# Altium PCB PCB2.PcbDoc (part 1 of 7)
Units mm, origin at the board's own origin, x right, y up, seen from the top; angles counter-clockwise.
Board outline 49 x 45 mm, 6 copper layers (Component Side, GND1, 3.3V, 1.2V, GND2, Solder Side), stack 1.629 mm thick; 56 components, 116 nets, 925 pads, 478 vias.
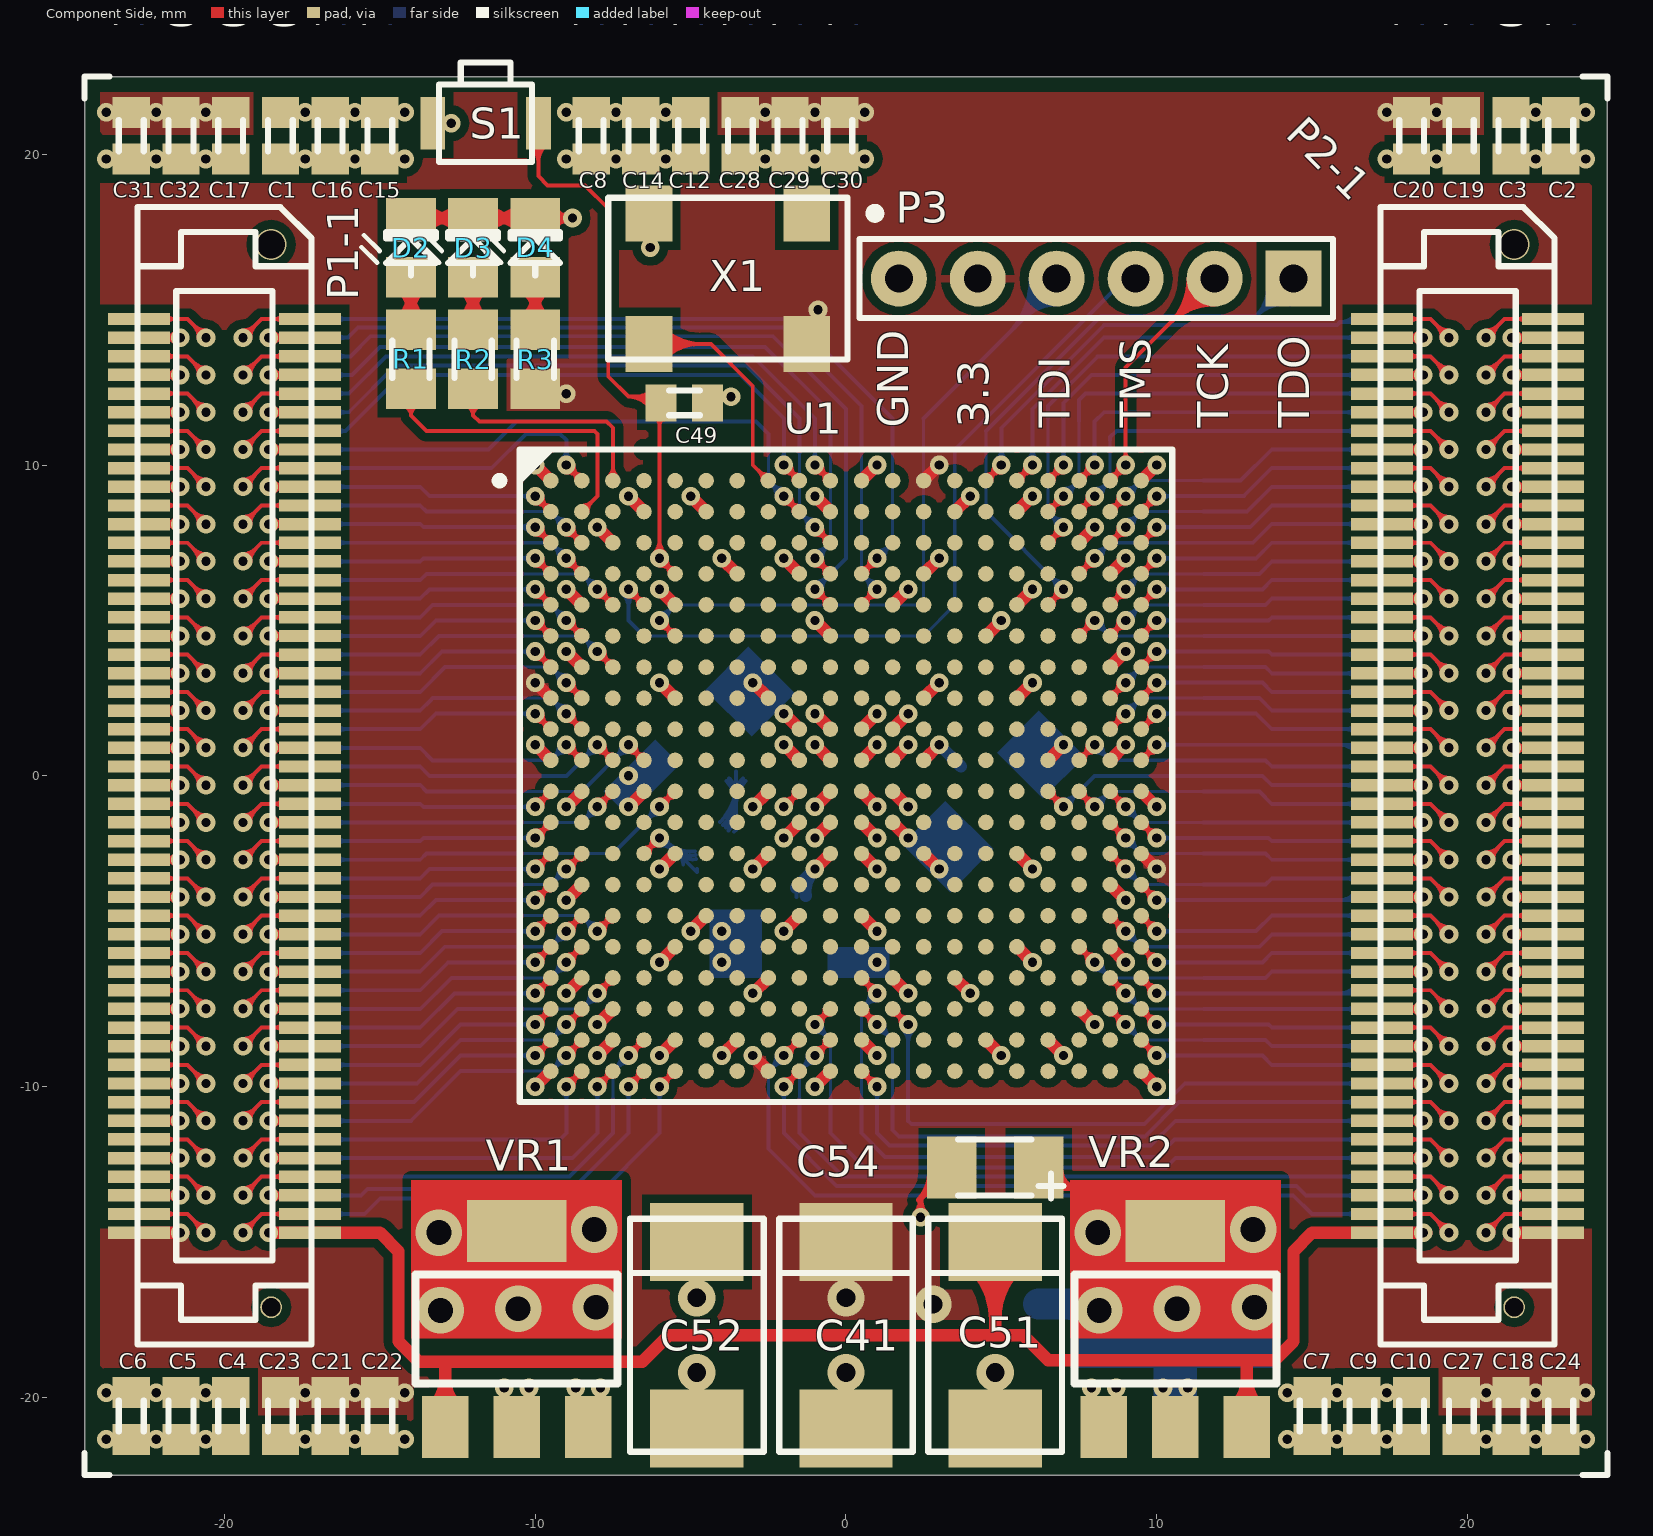
[diagram p0: Component Side view]
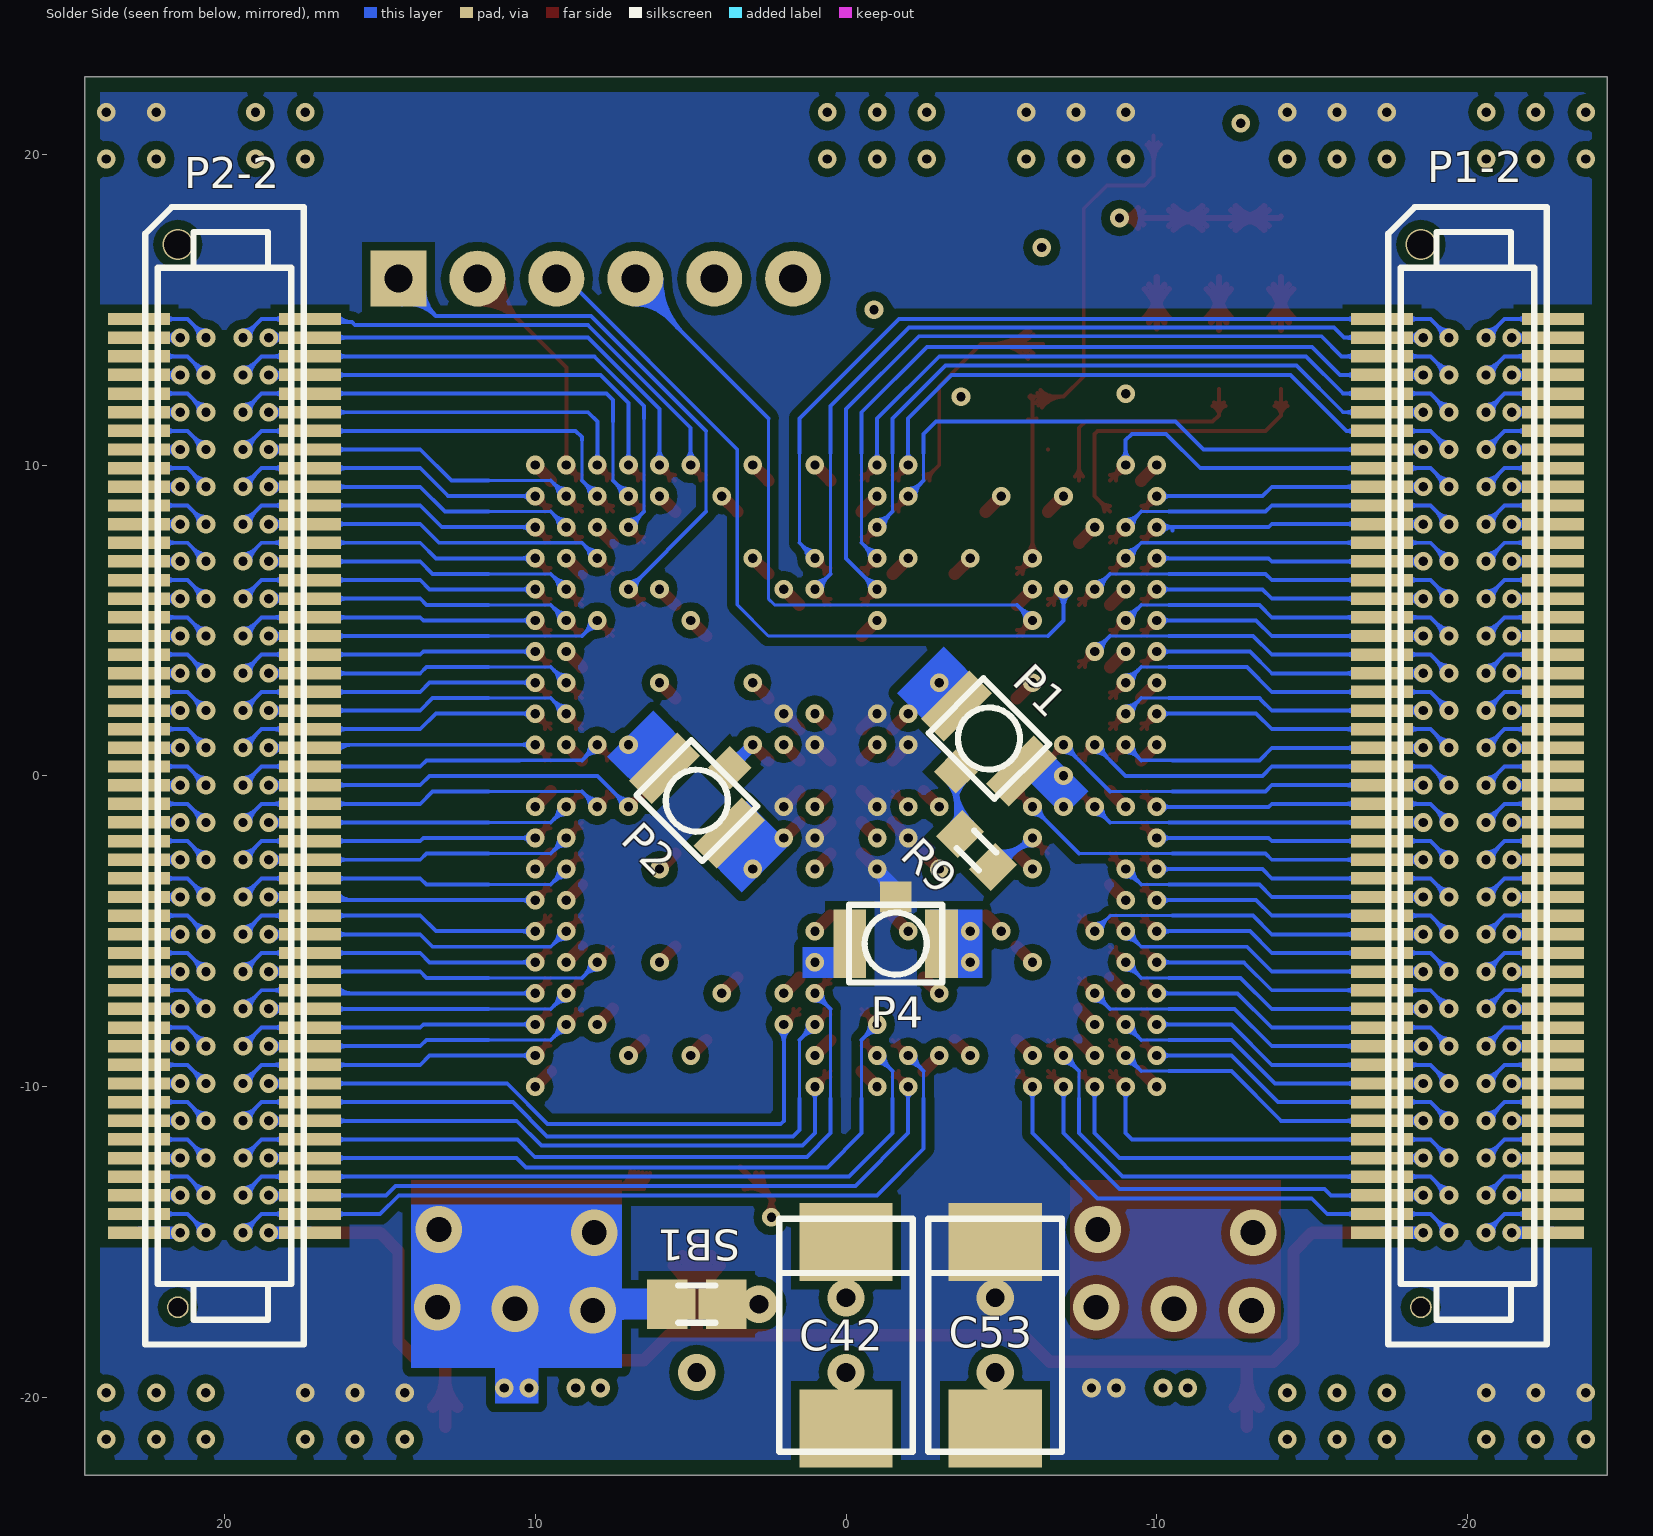
[diagram p1: Solder Side view, seen from below]
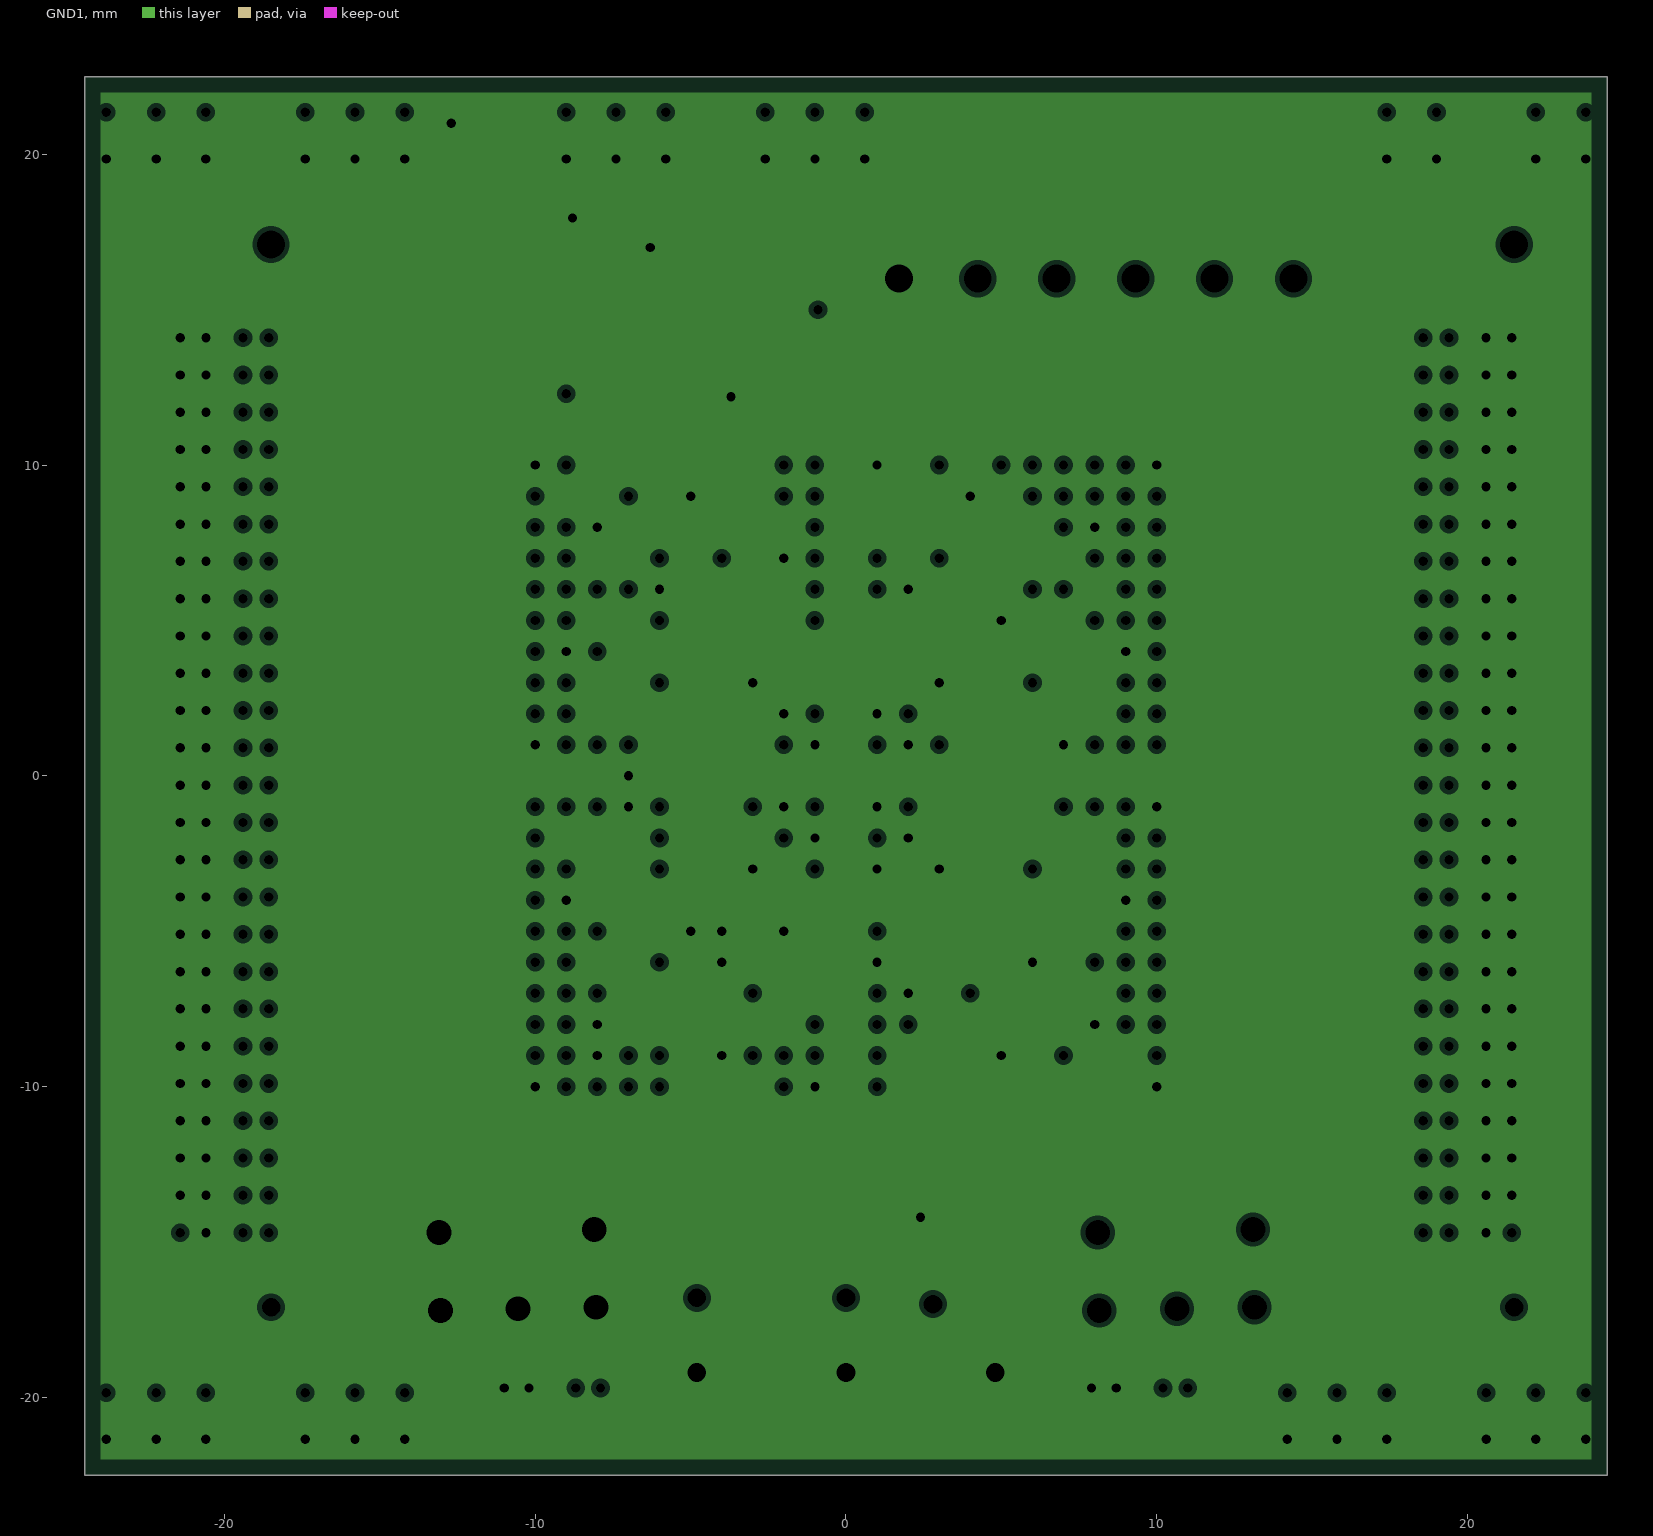
[diagram p2: GND1, clearances drawn from the general rule]
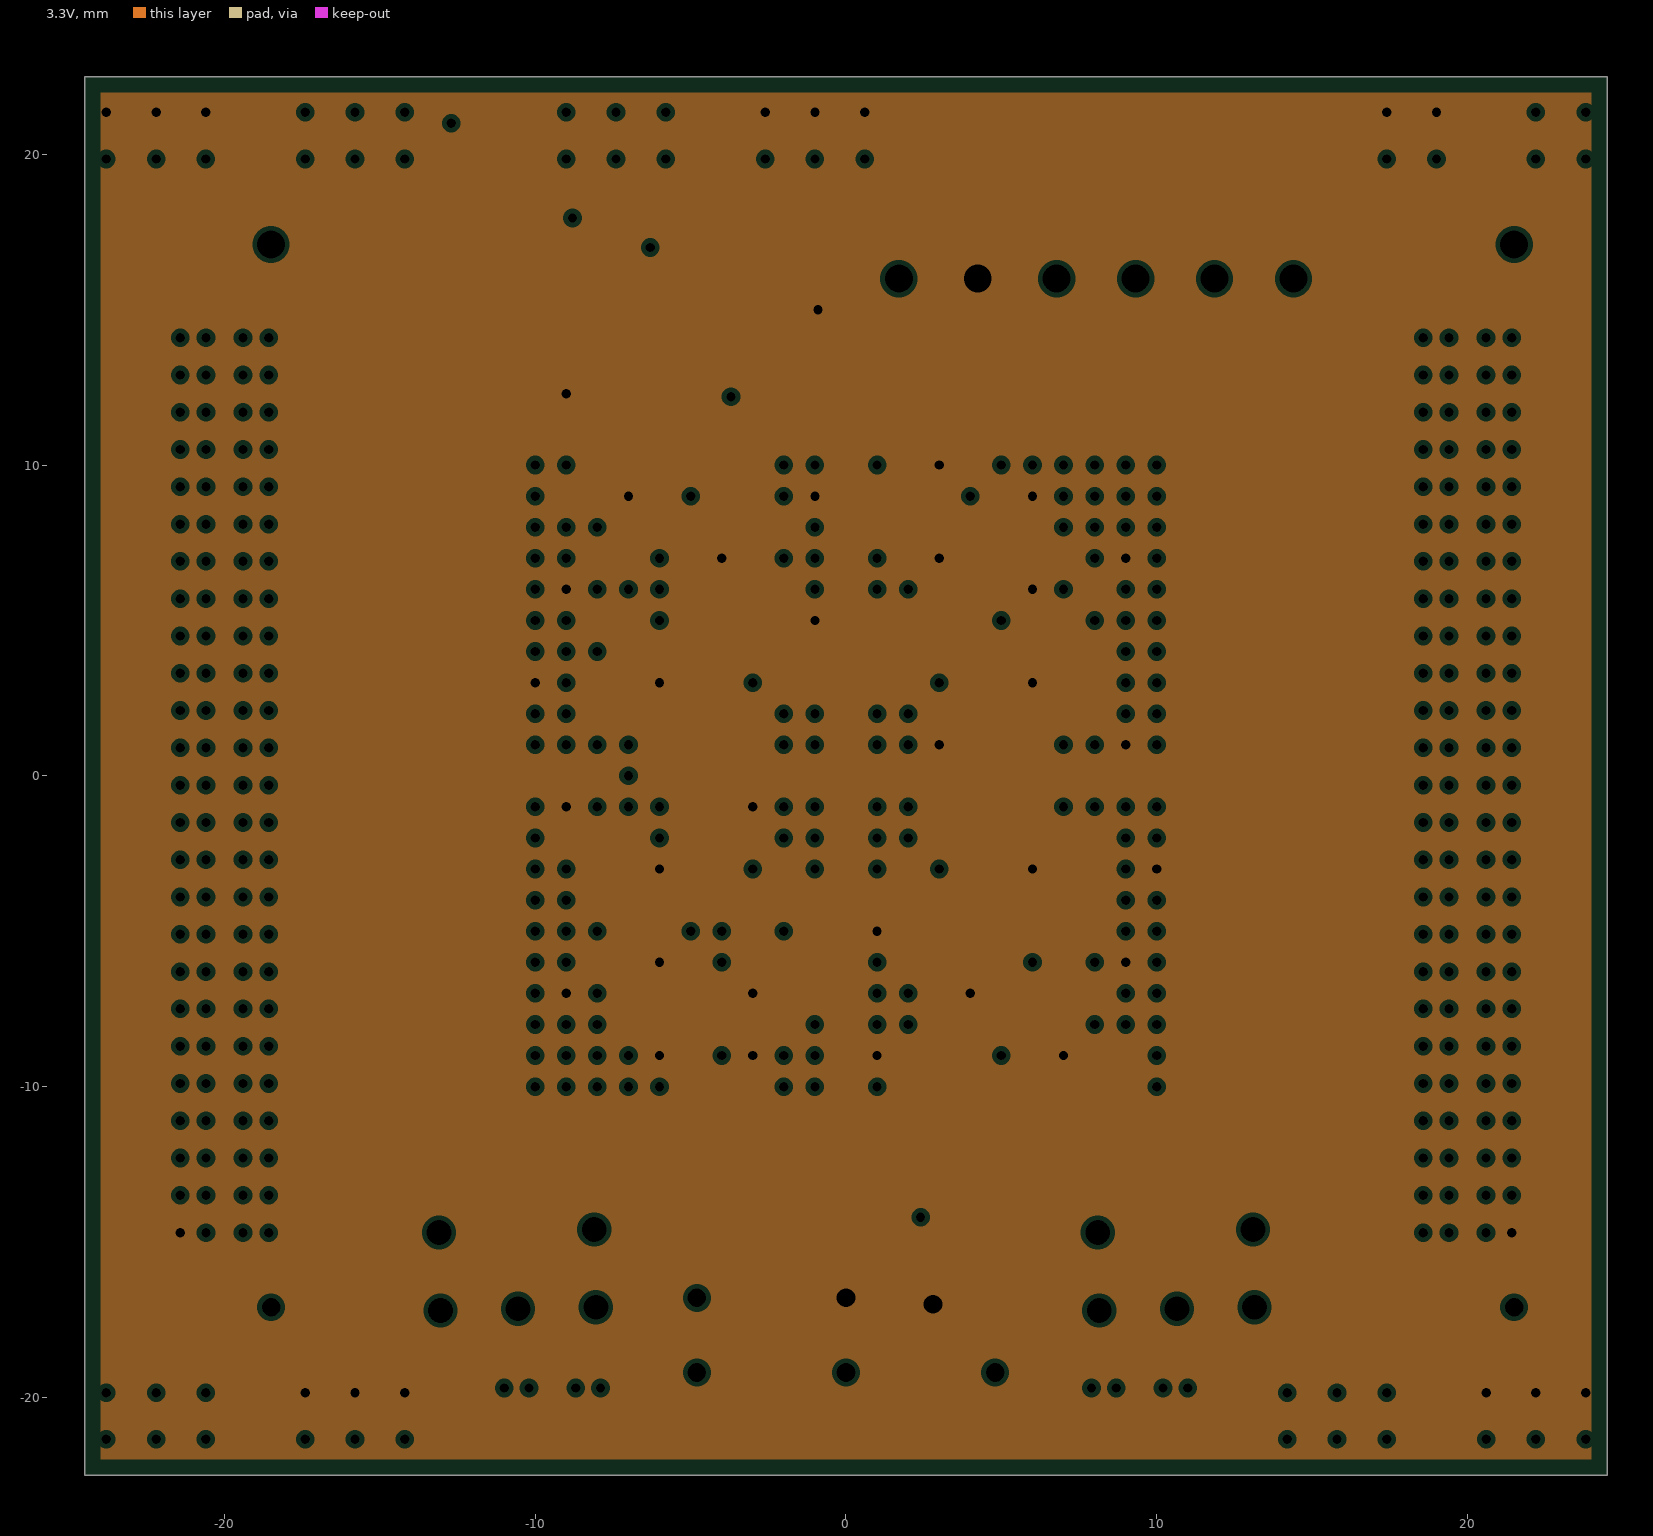
[diagram p3: 3.3V, clearances drawn from the general rule]
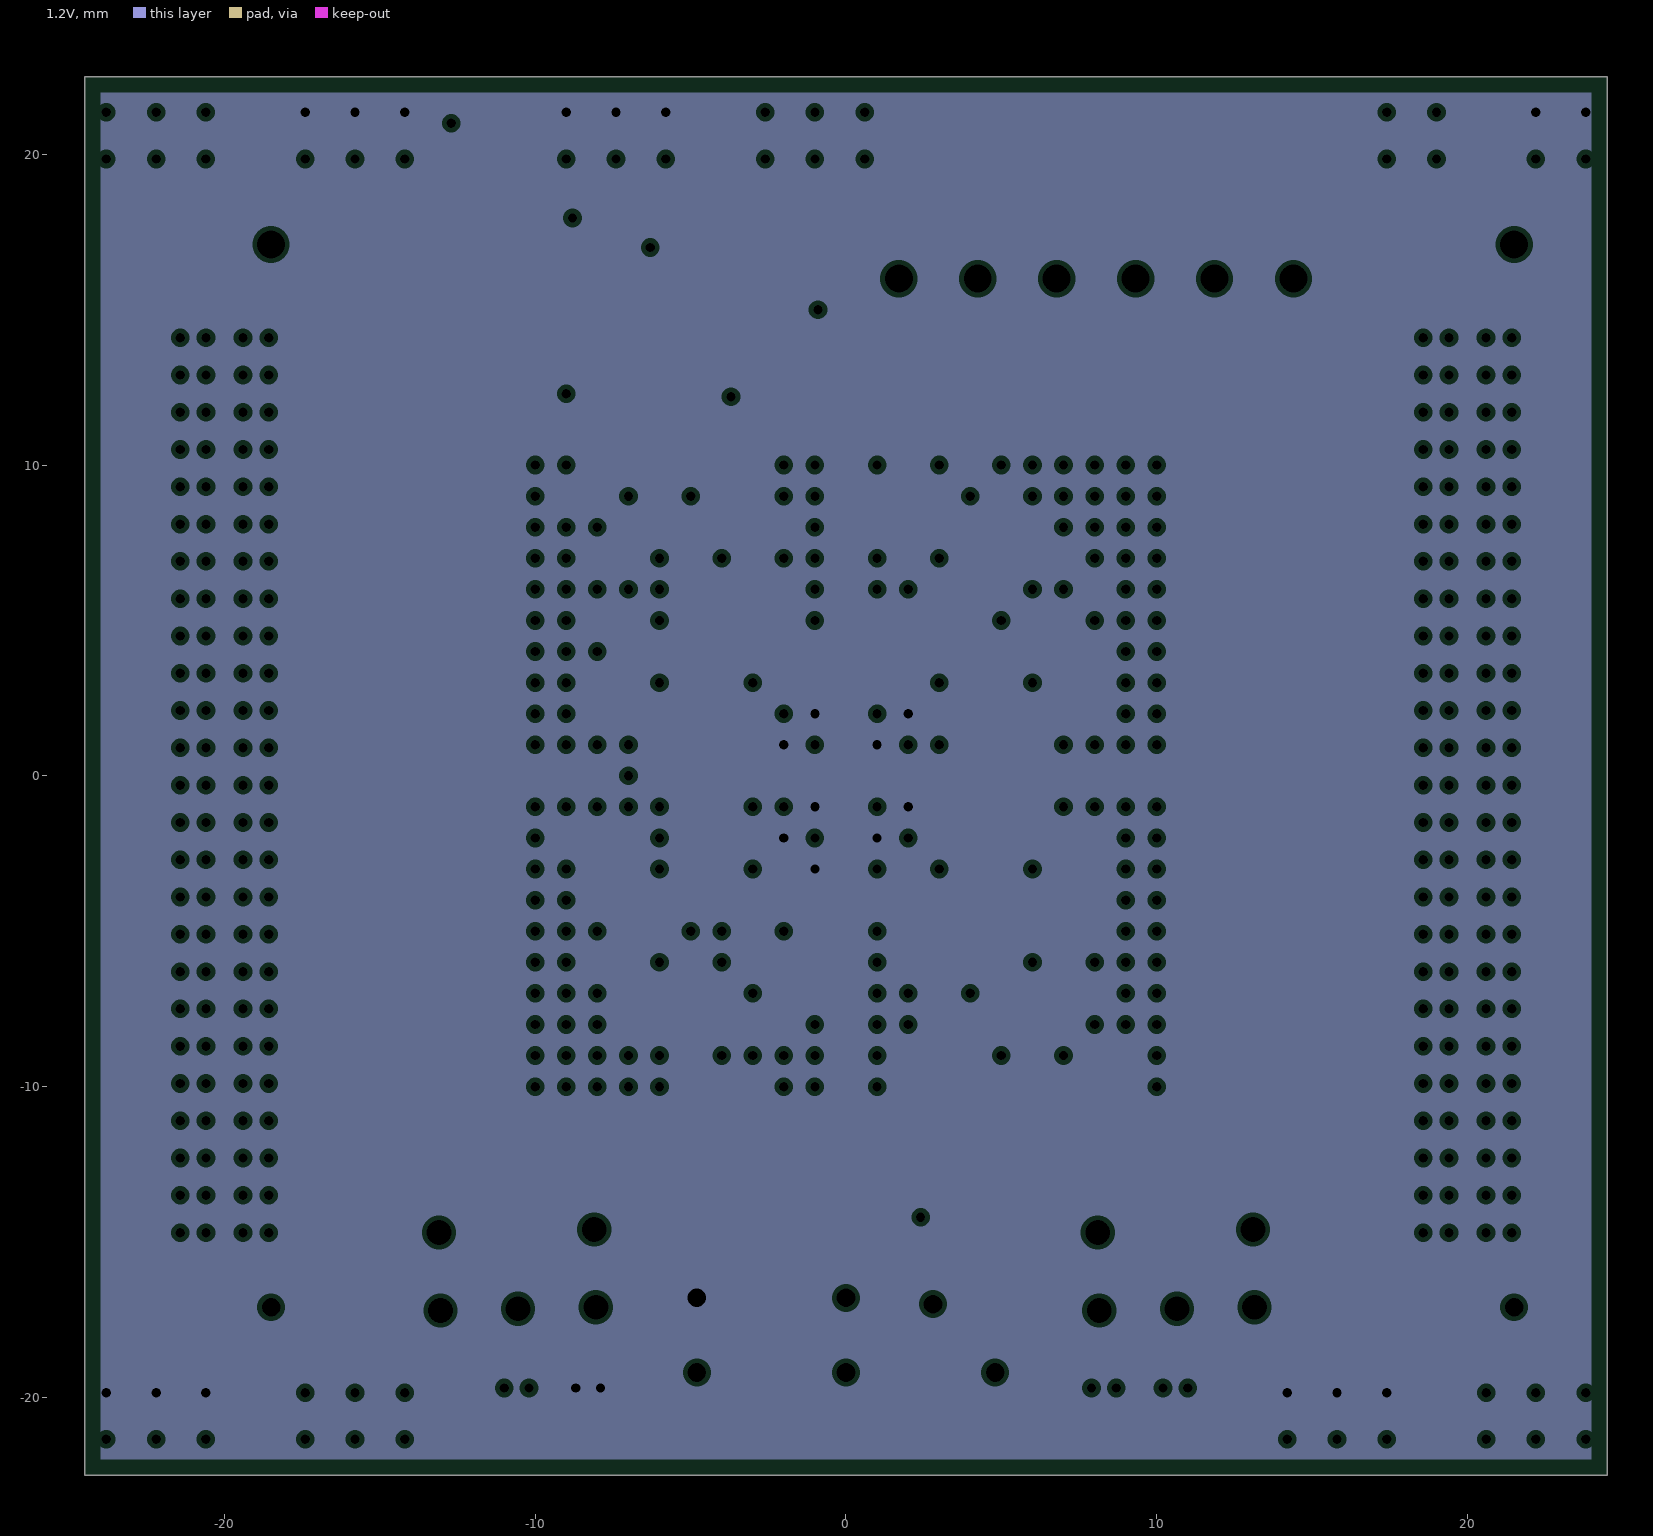
[diagram p4: 1.2V, clearances drawn from the general rule]
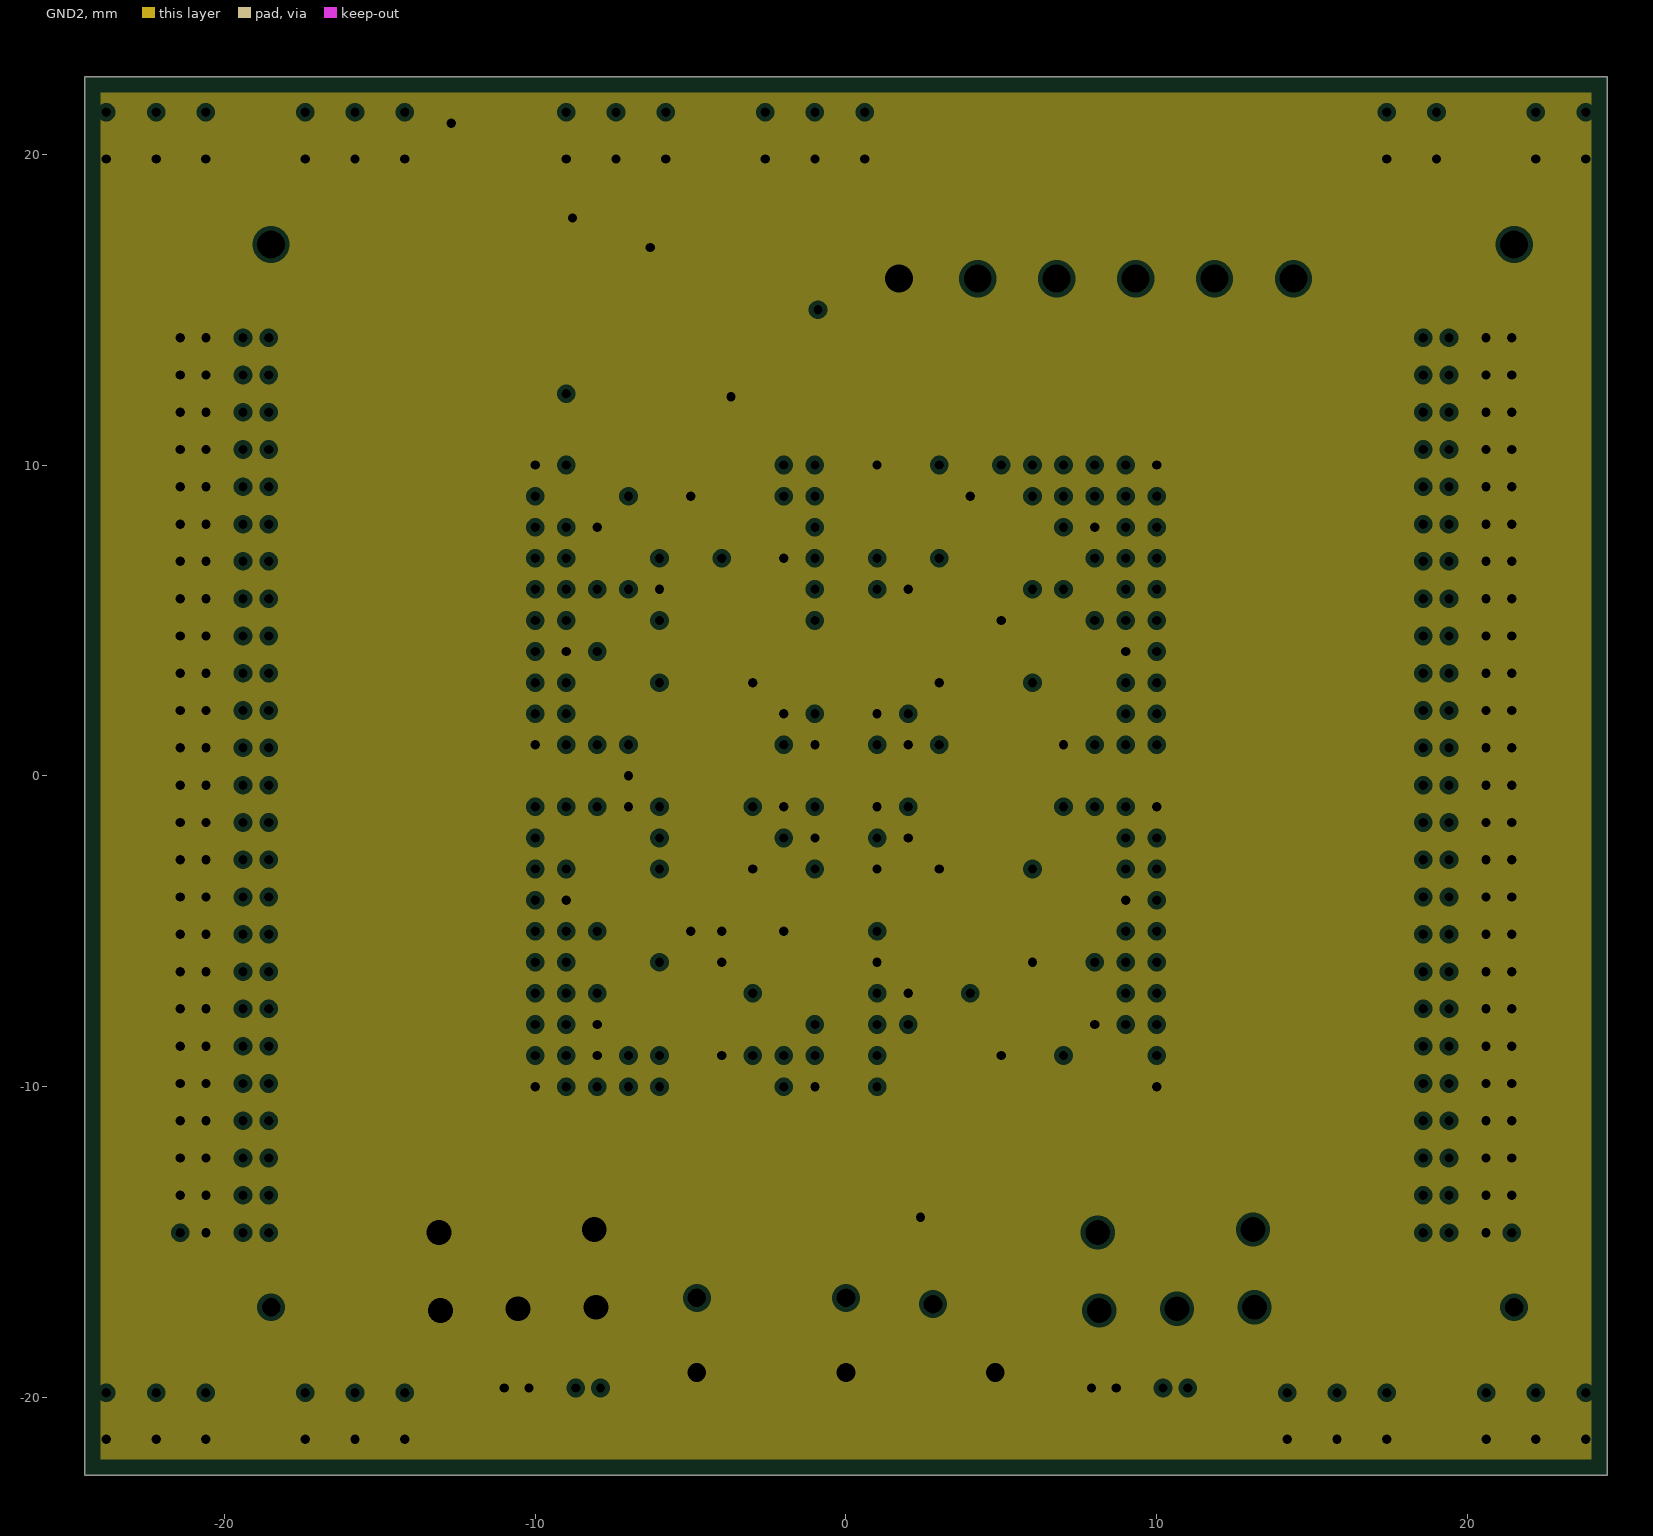
[diagram p5: GND2, clearances drawn from the general rule]

## Layer stack, top to bottom
Component Side: signal copper 0.0175
Dielectric: prepreg 0.126, FR-4, Dk 4
GND1: plane copper 0.0356, net GND
Dielectric: core 0.15, FR-4, Dk 4
3.3V: plane copper 0.0356, net 3.3V
Dielectric: prepreg 0.9, FR-4, Dk 4
1.2V: plane copper 0.0356, net 1.2V
Dielectric: core 0.15, FR-4, Dk 4
GND2: plane copper 0.0356, net GND
Dielectric: prepreg 0.126, FR-4, Dk 4
Solder Side: signal copper 0.0175

## Board outline
-24.5,-22.5 -24.5,22.5 24.5,22.5 24.5,-22.5

## Design rules (kind name [scope] priority, off if disabled: settings)
Clearance Clearance_polygons [(IsRegion)] p1: gap=0.28
Clearance [All] p2: gap=0.15
FanoutControl Fanout_Small [(CompPinCount < 5)] p4: bgadir=Out bgaviamode=Centered fanoutstyle=Auto fanoutdirection=Alternating viagrid=0.025 // Fanout_Small (Default Rule)
FanoutControl Fanout_Default [All] p5: bgadir=Out bgaviamode=Centered fanoutstyle=Auto fanoutdirection=InOnly viagrid=0.025 // Fanout_Default (Default Rule)
OvershootFalling [All] p1: maximum=300,0
OvershootRising [All] p1: maximum=300,0
PlaneClearance [All] p1: clearance=0.15
PlaneConnect PlaneConnect_Comp [All  And  Not  (InComponent('P3'))] p1: planeconnectstyle=Direct reliefexpansion=0.508 reliefentries=4 reliefconductorwidth=0.254 reliefairgap=0.254
PlaneConnect PlaneConnect_Vias [(InComponent('P3'))] p2: planeconnectstyle=Relief reliefexpansion=0.508 reliefentries=2 reliefconductorwidth=0.254 reliefairgap=0.254
PolygonConnect PolygonConnect_1 [(InComponent('P3'))] p1: connectstyle=Relief reliefconductorwidth=0.254 reliefentries=2 polygonreliefangle="90 Angle"
PolygonConnect [All  And  Not  (InComponent('P3'))] p2: connectstyle=Direct reliefconductorwidth=0.254 reliefentries=4 polygonreliefangle="90 Angle"
RoomDefinition Bank0&1 [InComponentClass('Bank0&1')] p1: confinementstyle=ConfineOut formatcopy=TRUE lockcomponents=FALSE outline 65.5,-57 89.4,-57 89.4,-3 65.5,-3
RoomDefinition Connectors [InComponentClass('Connectors')] p2: confinementstyle=ConfineOut formatcopy=TRUE lockcomponents=FALSE outline 30.9,-65 58.1,-65 58.1,-59.5 30.9,-59.5
RoomDefinition Power [InComponentClass('Power')] p3: confinementstyle=ConfineOut formatcopy=TRUE lockcomponents=FALSE outline 60.8,-68.7 66.4,-68.7 66.4,-59.5 60.8,-59.5
RoutingVias [All] p1: holewidth=0.3 width=0.6 viastyle="Through Hole" minholewidth=0.3 minwidth=0.6 maxholewidth=0.8 maxwidth=1.5
SignalStimulus [All] p1: kind=1 level=0 starttime=10,00 stoptime=60,00 periodtime=100,0
SilkscreenOverComponentPads [All] p1: minsilkscreentomaskgap=0.254
SolderMaskExpansion [All] p1: expansion=0.102
TestPointUsage [All] p1: valid=0 allowmultiple=FALSE
Testpoint [All] p1: side=15 testpointundercomponent=TRUE minsize=1.016 maxsize=2.54 preferedsize=1.524 minholesize=0 maxholesize=1.016 preferedholesize=0.813 testpointgrid=0.025 style=1023 order=0-112345678
UndershootFalling [All] p1: maximum=300,0
UndershootRising [All] p1: maximum=300,0
Width [All] p1: maxlimit=0.8 minlimit=0.1 preferedwidth=0.127
19 further rules are at their usual default settings.

## Classes and differential pairs
component class Connectors: D2 D3 D4 P1-1 P1-2 P1-02 P2-1 P2-01 P2-2 R1 R2 R3
component class Power: C1 C2 C3 C4 C5 C6 C7 C8 C9 C10 C12 C14 C15 C16 C17 C18 C19 C20 C21 C22 C23 C24 C27 C28 C29 C30 C31 C32 C41 C42 C49 C51 C52 C53 C54 P1 P2 P3 P4 R9 S1 SB1 VR1 VR2 X1
component class Bank0&1: U1

## Components (designator, comment, footprint, x,y, rotation, side; value= is the part's Value field where it differs from the comment)
C1 "Cap" 0603 -18.2,20.6 r90 top
C2 "Cap" 0603 23,20.6 r90 top
C3 "Cap" 0603 21.4,20.6 r90 top
C4 "Cap" 0603 -19.8,-20.6 r90 top
C5 "Cap" 0603 -21.4,-20.6 r90 top
C6 "Cap" 0603 -23,-20.6 r90 top
C7 "Cap" 0603 15,-20.6 r90 top
C8 "Cap" 0603 -8.2,20.6 r90 top
C9 "Cap" 0603 16.6,-20.6 r90 top
C10 "Cap" 0603 18.2,-20.6 r90 top
C12 "Cap" 0603 -5,20.6 r90 top
C14 "Cap" 0603 -6.6,20.6 r90 top
C15 "Cap" 0603 -15,20.6 r90 top
C16 "Cap" 0603 -16.6,20.6 r90 top
C17 "Cap" 0603 -19.8,20.6 r90 top
C18 "Cap" 0603 21.4,-20.6 r90 top
C19 "Cap" 0603 19.8,20.6 r90 top
C20 "Cap" 0603 18.2,20.6 r90 top
C21 "Cap" 0603 -16.6,-20.6 r90 top
C22 "Cap" 0603 -15,-20.6 r90 top
C23 "Cap" 0603 -18.2,-20.6 r90 top
C24 "Cap" 0603 23,-20.6 r90 top
C27 "Cap" 0603 19.8,-20.6 r90 top
C28 "Cap" 0603 -3.4,20.6 r90 top
C29 "Cap" 0603 -1.8,20.6 r90 top
C30 "Cap" 0603 -0.2,20.6 r90 top
C31 "Cap" 0603 -23,20.6 r90 top
C32 "Cap" 0603 -21.4,20.6 r90 top
C41 "Cap Pol1" "TANTAL SIZE X" 0,-18 r270 top
C42 "Cap Pol1" "TANTAL SIZE X" 0,-18 r270 bottom
C49 "Cap" 0603 -5.2,12 r180 top
C51 "Cap Pol1" "TANTAL SIZE X" 4.8,-18 r270 top
C52 "Cap Pol1" "TANTAL SIZE X" -4.8,-18 r270 top
C53 "Cap Pol1" "TANTAL SIZE X" -4.8,-18 r270 bottom
C54 "Cap Pol1" 1206Pol 4.8,-12.6 r180 top
D2 "LED1" LED0805 -14,17 r90 top
D3 "LED2" LED0805 -12,17 r90 top
D4 "POWER" LED0805 -10,17 r90 top
P1 "BNC" "Miniature Coaxial Connectors" -4.6,1.2 r45 bottom
P1-1 "Header 50X2" FX8C-100S-SV(91) -20,0 r270 top locked
P1-2 "Header 50X2" FX8C-100P-SV6(91) -20,0 r270 bottom locked
P2 "BNC" "Miniature Coaxial Connectors" 4.8,-0.8 r225 bottom
P2-1 "Header 50X2" FX8C-100S-SV(91) 20,0 r270 top locked
P2-2 "Header 50X2" FX8C-100P-SV6(91) 20,0 r270 bottom locked
P3 "Header 6" HDR1X6 14.4,16 r180 top
P4 "BNC" "Miniature Coaxial Connectors" -1.6,-5.4 r180 bottom
R1 "Res2" 0805 -14,13.4 r270 top
R2 "Res2" 0805 -12,13.4 r270 top
R3 "Res2" 0805 -10,13.4 r270 top
R9 "Res2" 0603 -4.2,-2.4 r45 bottom
S1 "RESET" B3U-3000P -11.6,21 r0 top
SB1 "Solder Blob" "0805 V.SOLDER_BLOB" 4.8,-17 r180 bottom
U1 "XC3S400AN-4FGG400C" FGG400 0,0 r0 top locked
VR1 "NCP566" SOT-223 -10.6,-17.8 r0 top
VR2 "LM1117" SOT-223 10.6,-17.8 r0 top
X1 "CTX283LVCT el. CFPS-39" CB3LV-3C-50M0000 -3.8,16 r180 top

## Footprints (in the part's own frame and the unit in brackets; to place one, negate y for a bottom-side part, rotate by r counter-clockwise, add the part's x,y. Pads: shape width x height; smd on the part's side, far side on the other; paste and mask are expansions set on the pad)
0603 [mm]
  rect 1x1.2 smd mask+0.05: 1(-0.75,0) 2(0.75,0)
  silkscreen extent -0.5,-0.4 0.5,0.4, body extent -0.75,-0.4 0.75,0.4, height 0.4
0805 [mm] "Resistor - MELF-R2012-0805"
  rect 1.3x1.6 smd mask+0.05: 1(-0.95,0) 2(0.95,0)
  silkscreen extent -0.6,-0.6 0.6,0.6, body extent -1,-0.6 1,0.6, height 0.5
"0805 V.SOLDER_BLOB" [mm] "Resistor - MELF-R2012-0805"
  rect 1.3x1.6 smd mask+0.05: 1(-0.95,0) 2(0.95,0)
  rect 0.5x1 smd mask+0.05: ""(-0.3,0) ""(0.3,0)
  silkscreen extent -0.6,-0.6 0.6,0.6
1206Pol [mm]
  rect 1.6x2 smd: 1(-1.4,0) 2(1.4,0)
  silkscreen extent -2.2,-0.9 1.2,1, body extent -1.7,-0.9 1.7,0.9, height 1.85
B3U-3000P [mm] "Micro kant switch Farnell varenummer: 1333655"
  rect 0.8x1.7 smd: 1(-1.7,0) 2(1.7,0)
  silkscreen extent -1.5,-1.25 1.5,1.95, body extent -2,-1.25 2,1.95, height 1.2
CB3LV-3C-50M0000 [mm] "Digi-Key Part Number CTX283LVCT-ND"
  rect 1.5x1.8 smd: 1(-2.54,-2.1) 2(2.54,-2.1) 3(2.54,2.1) 4(-2.54,2.1)
  silkscreen extent -4.86,-2.6 3.85,2.6, body extent -3.5,-2.5 3.5,2.5, height 1.4
FGG400 [mm] "BGA, 400-Leads, Body 21x21mm, Pitch 1mm"
  round 0.5 smd: A1(-9.5,9.5) A2(-8.5,9.5) A3(-7.5,9.5) A4(-6.5,9.5) A5(-5.5,9.5) A6(-4.5,9.5) A7(-3.5,9.5) A8(-2.5,9.5) A9(-1.5,9.5) A10(-0.5,9.5) A11(0.5,9.5) A12(1.5,9.5) A13(2.5,9.5) A14(3.5,9.5) A15(4.5,9.5) A16(5.5,9.5) A17(6.5,9.5) A18(7.5,9.5) A19(8.5,9.5) A20(9.5,9.5) B1(-9.5,8.5) B2(-8.5,8.5) B3(-7.5,8.5) B4(-6.5,8.5) B5(-5.5,8.5) B6(-4.5,8.5) B7(-3.5,8.5) B8(-2.5,8.5) B9(-1.5,8.5) B10(-0.5,8.5) B11(0.5,8.5) B12(1.5,8.5) B13(2.5,8.5) B14(3.5,8.5) B15(4.5,8.5) B16(5.5,8.5) B17(6.5,8.5) B18(7.5,8.5) B19(8.5,8.5) B20(9.5,8.5) C1(-9.5,7.5) C2(-8.5,7.5) C3(-7.5,7.5) C4(-6.5,7.5) C5(-5.5,7.5) C6(-4.5,7.5) C7(-3.5,7.5) C8(-2.5,7.5) C9(-1.5,7.5) C10(-0.5,7.5) C11(0.5,7.5) C12(1.5,7.5) C13(2.5,7.5) C14(3.5,7.5) C15(4.5,7.5) C16(5.5,7.5) C17(6.5,7.5) C18(7.5,7.5) C19(8.5,7.5) C20(9.5,7.5) D1(-9.5,6.5) D2(-8.5,6.5) D3(-7.5,6.5) D4(-6.5,6.5) D5(-5.5,6.5) D6(-4.5,6.5) D7(-3.5,6.5) D8(-2.5,6.5) D9(-1.5,6.5) D10(-0.5,6.5) D11(0.5,6.5) D12(1.5,6.5) D13(2.5,6.5) D14(3.5,6.5) D15(4.5,6.5) D16(5.5,6.5) D17(6.5,6.5) D18(7.5,6.5) D19(8.5,6.5) D20(9.5,6.5) E1(-9.5,5.5) E2(-8.5,5.5) E3(-7.5,5.5) E4(-6.5,5.5) E5(-5.5,5.5) E6(-4.5,5.5) E7(-3.5,5.5) E8(-2.5,5.5) E9(-1.5,5.5) E10(-0.5,5.5) E11(0.5,5.5) E12(1.5,5.5) E13(2.5,5.5) E14(3.5,5.5) E15(4.5,5.5) E16(5.5,5.5) E17(6.5,5.5) E18(7.5,5.5) E19(8.5,5.5) E20(9.5,5.5) F1(-9.5,4.5) F2(-8.5,4.5) F3(-7.5,4.5) F4(-6.5,4.5) F5(-5.5,4.5) F6(-4.5,4.5) F7(-3.5,4.5) F8(-2.5,4.5) F9(-1.5,4.5) F10(-0.5,4.5) F11(0.5,4.5) F12(1.5,4.5) F13(2.5,4.5) F14(3.5,4.5) F15(4.5,4.5) F16(5.5,4.5) F17(6.5,4.5) F18(7.5,4.5) F19(8.5,4.5) F20(9.5,4.5) G1(-9.5,3.5) G2(-8.5,3.5) G3(-7.5,3.5) G4(-6.5,3.5) G5(-5.5,3.5) G6(-4.5,3.5) G7(-3.5,3.5) G8(-2.5,3.5) G9(-1.5,3.5) G10(-0.5,3.5) G11(0.5,3.5) G12(1.5,3.5) G13(2.5,3.5) G14(3.5,3.5) G15(4.5,3.5) G16(5.5,3.5) G17(6.5,3.5) G18(7.5,3.5) G19(8.5,3.5) G20(9.5,3.5) H1(-9.5,2.5) H2(-8.5,2.5) H3(-7.5,2.5) H4(-6.5,2.5) H5(-5.5,2.5) H6(-4.5,2.5) H7(-3.5,2.5) H8(-2.5,2.5) H9(-1.5,2.5) H10(-0.5,2.5) H11(0.5,2.5) H12(1.5,2.5) H13(2.5,2.5) H14(3.5,2.5) H15(4.5,2.5) H16(5.5,2.5) H17(6.5,2.5) H18(7.5,2.5) H19(8.5,2.5) H20(9.5,2.5) J1(-9.5,1.5) J2(-8.5,1.5) J3(-7.5,1.5) J4(-6.5,1.5) J5(-5.5,1.5) J6(-4.5,1.5) J7(-3.5,1.5) J8(-2.5,1.5) J9(-1.5,1.5) J10(-0.5,1.5) J11(0.5,1.5) J12(1.5,1.5) J13(2.5,1.5) J14(3.5,1.5) J15(4.5,1.5) J16(5.5,1.5) J17(6.5,1.5) J18(7.5,1.5) J19(8.5,1.5) J20(9.5,1.5) K1(-9.5,0.5) K2(-8.5,0.5) K3(-7.5,0.5) K4(-6.5,0.5) K5(-5.5,0.5) K6(-4.5,0.5) K7(-3.5,0.5) K8(-2.5,0.5) K9(-1.5,0.5) K10(-0.5,0.5) K11(0.5,0.5) K12(1.5,0.5) K13(2.5,0.5) K14(3.5,0.5) K15(4.5,0.5) K16(5.5,0.5) K17(6.5,0.5) K18(7.5,0.5) K19(8.5,0.5) K20(9.5,0.5) L1(-9.5,-0.5) L2(-8.5,-0.5) L3(-7.5,-0.5) L4(-6.5,-0.5) L5(-5.5,-0.5) L6(-4.5,-0.5) L7(-3.5,-0.5) L8(-2.5,-0.5) L9(-1.5,-0.5) L10(-0.5,-0.5) L11(0.5,-0.5) L12(1.5,-0.5) L13(2.5,-0.5) L14(3.5,-0.5) L15(4.5,-0.5) L16(5.5,-0.5) L17(6.5,-0.5) L18(7.5,-0.5) L19(8.5,-0.5) L20(9.5,-0.5) M1(-9.5,-1.5) M2(-8.5,-1.5) M3(-7.5,-1.5) M4(-6.5,-1.5) M5(-5.5,-1.5) M6(-4.5,-1.5) M7(-3.5,-1.5) M8(-2.5,-1.5) M9(-1.5,-1.5) M10(-0.5,-1.5) M11(0.5,-1.5) M12(1.5,-1.5) M13(2.5,-1.5) M14(3.5,-1.5) M15(4.5,-1.5) M16(5.5,-1.5) M17(6.5,-1.5) M18(7.5,-1.5) M19(8.5,-1.5) M20(9.5,-1.5) N1(-9.5,-2.5) N2(-8.5,-2.5) N3(-7.5,-2.5) N4(-6.5,-2.5) N5(-5.5,-2.5) N6(-4.5,-2.5) N7(-3.5,-2.5) N8(-2.5,-2.5) N9(-1.5,-2.5) N10(-0.5,-2.5) N11(0.5,-2.5) N12(1.5,-2.5) N13(2.5,-2.5) N14(3.5,-2.5) N15(4.5,-2.5) N16(5.5,-2.5) N17(6.5,-2.5) N18(7.5,-2.5) N19(8.5,-2.5) N20(9.5,-2.5) P1(-9.5,-3.5) P2(-8.5,-3.5) P3(-7.5,-3.5) P4(-6.5,-3.5) P5(-5.5,-3.5) P6(-4.5,-3.5) P7(-3.5,-3.5) P8(-2.5,-3.5) P9(-1.5,-3.5) P10(-0.5,-3.5) P11(0.5,-3.5) P12(1.5,-3.5) P13(2.5,-3.5) P14(3.5,-3.5) P15(4.5,-3.5) P16(5.5,-3.5) P17(6.5,-3.5) P18(7.5,-3.5) P19(8.5,-3.5) P20(9.5,-3.5) R1(-9.5,-4.5) R2(-8.5,-4.5) R3(-7.5,-4.5) R4(-6.5,-4.5) R5(-5.5,-4.5) R6(-4.5,-4.5) R7(-3.5,-4.5) R8(-2.5,-4.5) R9(-1.5,-4.5) R10(-0.5,-4.5) R11(0.5,-4.5) R12(1.5,-4.5) R13(2.5,-4.5) R14(3.5,-4.5) R15(4.5,-4.5) R16(5.5,-4.5) R17(6.5,-4.5) R18(7.5,-4.5) R19(8.5,-4.5) R20(9.5,-4.5) T1(-9.5,-5.5) T2(-8.5,-5.5) T3(-7.5,-5.5) T4(-6.5,-5.5) T5(-5.5,-5.5) T6(-4.5,-5.5) T7(-3.5,-5.5) T8(-2.5,-5.5) T9(-1.5,-5.5) T10(-0.5,-5.5) T11(0.5,-5.5) T12(1.5,-5.5) T13(2.5,-5.5) T14(3.5,-5.5) T15(4.5,-5.5) T16(5.5,-5.5) T17(6.5,-5.5) T18(7.5,-5.5) T19(8.5,-5.5) T20(9.5,-5.5) U1(-9.5,-6.5) U2(-8.5,-6.5) U3(-7.5,-6.5) U4(-6.5,-6.5) U5(-5.5,-6.5) U6(-4.5,-6.5) U7(-3.5,-6.5) U8(-2.5,-6.5) U9(-1.5,-6.5) U10(-0.5,-6.5) U11(0.5,-6.5) U12(1.5,-6.5) U13(2.5,-6.5) U14(3.5,-6.5) U15(4.5,-6.5) U16(5.5,-6.5) U17(6.5,-6.5) U18(7.5,-6.5) U19(8.5,-6.5) U20(9.5,-6.5) V1(-9.5,-7.5) V2(-8.5,-7.5) V3(-7.5,-7.5) V4(-6.5,-7.5) V5(-5.5,-7.5) V6(-4.5,-7.5) V7(-3.5,-7.5) V8(-2.5,-7.5) V9(-1.5,-7.5) V10(-0.5,-7.5) V11(0.5,-7.5) V12(1.5,-7.5) V13(2.5,-7.5) V14(3.5,-7.5) V15(4.5,-7.5) V16(5.5,-7.5) V17(6.5,-7.5) V18(7.5,-7.5) V19(8.5,-7.5) V20(9.5,-7.5) W1(-9.5,-8.5) W2(-8.5,-8.5) W3(-7.5,-8.5) W4(-6.5,-8.5) W5(-5.5,-8.5) W6(-4.5,-8.5) W7(-3.5,-8.5) W8(-2.5,-8.5) W9(-1.5,-8.5) W10(-0.5,-8.5) W11(0.5,-8.5) W12(1.5,-8.5) W13(2.5,-8.5) W14(3.5,-8.5) W15(4.5,-8.5) W16(5.5,-8.5) W17(6.5,-8.5) W18(7.5,-8.5) W19(8.5,-8.5) W20(9.5,-8.5) Y1(-9.5,-9.5) Y2(-8.5,-9.5) Y3(-7.5,-9.5) Y4(-6.5,-9.5) Y5(-5.5,-9.5) Y6(-4.5,-9.5) Y7(-3.5,-9.5) Y8(-2.5,-9.5) Y9(-1.5,-9.5) Y10(-0.5,-9.5) Y11(0.5,-9.5) Y12(1.5,-9.5) Y13(2.5,-9.5) Y14(3.5,-9.5) Y15(4.5,-9.5) Y16(5.5,-9.5) Y17(6.5,-9.5) Y18(7.5,-9.5) Y19(8.5,-9.5) Y20(9.5,-9.5)
  silkscreen extent -11.27,-10.5 10.5,10.5, body extent -10.5,-10.5 10.5,10.5, height 2.43
FX8C-100P-SV6(91) [mm] "Digi-Key Part Number H11523-ND   100pin 0.6mm pitch"
  rect 0.4x2 smd: 1(-14.7,2.75) 2(-14.7,-2.75) 3(-14.1,2.75) 4(-14.1,-2.75) 5(-13.5,2.75) 6(-13.5,-2.75) 7(-12.9,2.75) 8(-12.9,-2.75) 9(-12.3,2.75) 10(-12.3,-2.75) 11(-11.7,2.75) 12(-11.7,-2.75) 13(-11.1,2.75) 14(-11.1,-2.75) 15(-10.5,2.75) 16(-10.5,-2.75) 17(-9.9,2.75) 18(-9.9,-2.75) 19(-9.3,2.75) 20(-9.3,-2.75) 21(-8.7,2.75) 22(-8.7,-2.75) 23(-8.1,2.75) 24(-8.1,-2.75) 25(-7.5,2.75) 26(-7.5,-2.75) 27(-6.9,2.75) 28(-6.9,-2.75) 29(-6.3,2.75) 30(-6.3,-2.75) 31(-5.7,2.75) 32(-5.7,-2.75) 33(-5.1,2.75) 34(-5.1,-2.75) 35(-4.5,2.75) 36(-4.5,-2.75) 37(-3.9,2.75) 38(-3.9,-2.75) 39(-3.3,2.75) 40(-3.3,-2.75) 41(-2.7,2.75) 42(-2.7,-2.75) 43(-2.1,2.75) 44(-2.1,-2.75) 45(-1.5,2.75) 46(-1.5,-2.75) 47(-0.9,2.75) 48(-0.9,-2.75) 49(-0.3,2.75) 50(-0.3,-2.75) 51(0.3,2.75) 52(0.3,-2.75) 53(0.9,2.75) 54(0.9,-2.75) 55(1.5,2.75) 56(1.5,-2.75) 57(2.1,2.75) 58(2.1,-2.75) 59(2.7,2.75) 60(2.7,-2.75) 61(3.3,2.75) 62(3.3,-2.75) 63(3.9,2.75) 64(3.9,-2.75) 65(4.5,2.75) 66(4.5,-2.75) 67(5.1,2.75) 68(5.1,-2.75) 69(5.7,2.75) 70(5.7,-2.75) 71(6.3,2.75) 72(6.3,-2.75) 73(6.9,2.75) 74(6.9,-2.75) 75(7.5,2.75) 76(7.5,-2.75) 77(8.1,2.75) 78(8.1,-2.75) 79(8.7,2.75) 80(8.7,-2.75) 81(9.3,2.75) 82(9.3,-2.75) 83(9.9,2.75) 84(9.9,-2.75) 85(10.5,2.75) 86(10.5,-2.75) 87(11.1,2.75) 88(11.1,-2.75) 89(11.7,2.75) 90(11.7,-2.75) 91(12.3,2.75) 92(12.3,-2.75) 93(12.9,2.75) 94(12.9,-2.75) 95(13.5,2.75) 96(13.5,-2.75) 97(14.1,2.75) 98(14.1,-2.75) 99(14.7,2.75) 100(14.7,-2.75)
  round 1 hole 0.9: ""(-17.1,-1.5)
  round 0.7 hole 0.6: ""(17.1,-1.5)
  silkscreen extent -18.3,-2.55 18.3,2.55, body extent -18.3,-2.55 18.3,2.55, height 4.45
FX8C-100S-SV(91) [mm] "Digi-Key Part Number H11534-ND   100pin 0.6mm pitch"
  rect 0.4x2 smd: 1(-14.7,-2.75) 2(-14.7,2.75) 3(-14.1,-2.75) 4(-14.1,2.75) 5(-13.5,-2.75) 6(-13.5,2.75) 7(-12.9,-2.75) 8(-12.9,2.75) 9(-12.3,-2.75) 10(-12.3,2.75) 11(-11.7,-2.75) 12(-11.7,2.75) 13(-11.1,-2.75) 14(-11.1,2.75) 15(-10.5,-2.75) 16(-10.5,2.75) 17(-9.9,-2.75) 18(-9.9,2.75) 19(-9.3,-2.75) 20(-9.3,2.75) 21(-8.7,-2.75) 22(-8.7,2.75) 23(-8.1,-2.75) 24(-8.1,2.75) 25(-7.5,-2.75) 26(-7.5,2.75) 27(-6.9,-2.75) 28(-6.9,2.75) 29(-6.3,-2.75) 30(-6.3,2.75) 31(-5.7,-2.75) 32(-5.7,2.75) 33(-5.1,-2.75) 34(-5.1,2.75) 35(-4.5,-2.75) 36(-4.5,2.75) 37(-3.9,-2.75) 38(-3.9,2.75) 39(-3.3,-2.75) 40(-3.3,2.75) 41(-2.7,-2.75) 42(-2.7,2.75) 43(-2.1,-2.75) 44(-2.1,2.75) 45(-1.5,-2.75) 46(-1.5,2.75) 47(-0.9,-2.75) 48(-0.9,2.75) 49(-0.3,-2.75) 50(-0.3,2.75) 51(0.3,-2.75) 52(0.3,2.75) 53(0.9,-2.75) 54(0.9,2.75) 55(1.5,-2.75) 56(1.5,2.75) 57(2.1,-2.75) 58(2.1,2.75) 59(2.7,-2.75) 60(2.7,2.75) 61(3.3,-2.75) 62(3.3,2.75) 63(3.9,-2.75) 64(3.9,2.75) 65(4.5,-2.75) 66(4.5,2.75) 67(5.1,-2.75) 68(5.1,2.75) 69(5.7,-2.75) 70(5.7,2.75) 71(6.3,-2.75) 72(6.3,2.75) 73(6.9,-2.75) 74(6.9,2.75) 75(7.5,-2.75) 76(7.5,2.75) 77(8.1,-2.75) 78(8.1,2.75) 79(8.7,-2.75) 80(8.7,2.75) 81(9.3,-2.75) 82(9.3,2.75) 83(9.9,-2.75) 84(9.9,2.75) 85(10.5,-2.75) 86(10.5,2.75) 87(11.1,-2.75) 88(11.1,2.75) 89(11.7,-2.75) 90(11.7,2.75) 91(12.3,-2.75) 92(12.3,2.75) 93(12.9,-2.75) 94(12.9,2.75) 95(13.5,-2.75) 96(13.5,2.75) 97(14.1,-2.75) 98(14.1,2.75) 99(14.7,-2.75) 100(14.7,2.75)
  round 1 hole 0.9: ""(-17.1,1.5)
  round 0.7 hole 0.6: ""(17.1,1.5)
  silkscreen extent -18.3,-2.8 18.3,2.8, body extent -18.3,-2.8 18.3,2.8, height 3.85
HDR1X6 [mm]
  rect 1.8x1.8 hole 0.9: 1(0,0)
  round 1.8 hole 0.9: 2(2.54,0) 3(5.08,0) 4(7.62,0) 5(10.16,0) 6(12.7,0)
  silkscreen extent -1.27,-1.27 13.97,1.27, body extent -1.27,-1.27 13.97,1.27, height 9.5
LED0805 [mm] "Resistor - MELF-R2012-0805"
  rect 1.3x1.6 smd: 1(-0.95,0) 2(0.95,0)
  silkscreen extent -0.9,-0.8 0.5,1.59, body extent -1,-0.6 1,0.6, height 0.8
"Miniature Coaxial Connectors" [mm] "Meets up to 6 GHz Requirement"
  rect 1x1 smd: 1(0,1.5)
  rect 1.05x2.2 smd: 2(-1.475,0) 2(1.475,0)
  silkscreen extent -1.5,-1.25 1.5,1.25, body extent -1.5,-1.25 1.5,1.25, height 1.3
SOT-223 [mm]
  rect 1.5x2 smd: 1(-2.3,-3.15) 2(0,-3.15) 3(2.3,-3.15)
  rect 3.2x2 smd: 2(0,3.15)
  silkscreen extent -3.25,-1.75 3.25,1.75, body extent -3.25,-3.55 3.25,3.6, height 1.7
"TANTAL SIZE X" [mm] "KEMET Tantalum&Niobium Oxide  100uF, 10V og 33uF, 35V"
  rect 2.5x3 smd: 1(-3,0) 2(3,0)
  silkscreen extent -3.75,-2.15 3.75,2.15, body extent -3.75,-2.15 3.75,2.15, height 3.05

## Part data
C1 C2 C3 C4 C5 C6 C7 C8 C9 C10 C12 C14 C15 C16 C17 C18 C19 C20 C21 C22 C23 C24 C27 C28 C29 C30 C31 C32 C49: "!Capacitor"
C41 C42 C51 C52 C53 C54: "!Polarized Capacitor (Radial)"
D2 D3 D4: library part LED0, "LED"
P1 P2 P4: "Miniature Coaxial Connectors"
P1-1 P1-2 P2-1 P2-2: "Header, 30-Pin, Dual row"
P3: "Header, 6-Pin"
R1 R2 R3 R9: "!Resistor"
S1: library part SW-PB, "Switch"
SB1: library part Jumper
U1: "Spartan-3AN Non-Volatile FPGA, 311 User I/Os, 400-Pin FBGA, Standard Performance, Commercial Grade, Pb-Free"
VR1: library part "Volt Reg", "Volt Reg NCP566"
VR2: "800mA Low-Dropout Linear Regulator"
X1: library part CFPS-39, "3.3V, ultra minature surface mount oscillator"

## Via types
v1: diameter 0.6, hole 0.3, Component Side to Solder Side, tented both sides, 462 vias
v2: diameter 1.5, hole 0.8, Component Side to Solder Side, 10 vias
v3: diameter 1.2, hole 0.6, Component Side to Solder Side, 6 vias

## Nets (pads, with @x,y where several pads share a name; then routed paths per layer and width w, separated by ;. In a path a pad name is that pad's centre, name@x,y a point inside that pad or via, vN(x,y) a via of type N, cw(c..) or ccw(c..) an arc to the next point about the centre after c; other vN are vias at no path point)
1.2V: C1.2 C2.2 C3.2 C4.2 C5.2 C6.2 C7.2 C8.2 C9.2 C10.2 C12.2 C14.2 C15.2 C16.2 C52.1 C53.1 P4.1 U1.J10 U1.J12 U1.K9 U1.K11 U1.L10 U1.L12 U1.M9 U1.M11 U1.N10 VR1.3 | length 9.4
  Component Side w0.4: v1(-2,-2) U1.M9@-1.5,-1.5 ; v1(-2,1) U1.K9@-1.5,0.5 ; v1(-1,-3) U1.N10@-0.5,-2.5 ; v1(-1,-1) U1.L10@-0.5,-0.5 ; v1(-1,2) U1.J10@-0.5,1.5 ; U1.M11@0.5,-1.5 v1(1,-2) ; U1.K11@0.5,0.5 v1(1,1) ; U1.L12@1.5,-0.5 v1(2,-1) ; U1.J12@1.5,1.5 v1(2,2)
  Solder Side w0.127: P4.1@-1.6,-3.9 P4.1@-1.6,-3.6
  Solder Side w0.4: P4.1@-1.6,-3.6 v1(-1,-3) ; v1(-1,-3) ccw(c-0.255,-3.745) -1.302,-3.866 cw(c-0.255,-3.745) v1(-1,-3)
  other v1: -23.8,-19.85 -22.2,-19.85 -20.6,-19.85 14.2,-19.85 15.8,-19.85 17.4,-19.85 -8.7,-19.7 -7.9,-19.7 -17.4,21.35 -15.8,21.35 -14.2,21.35 -9,21.35 -7.4,21.35 -5.8,21.35 22.2,21.35 23.8,21.35
  other v3: -4.8,-16.8
3.3V: C17.2 C18.2 C19.2 C20.2 C21.2 C22.2 C23.2 C24.2 C27.2 C28.2 C29.2 C30.2 C31.2 C32.2 C41.1 C42.1 P1-1.99 P1-2.99 P2-1.100 P2-2.100 P2.1 P3.5 R3.2 SB1.2 U1.A13 U1.B4 U1.B10 U1.B16 U1.D7 U1.D13 U1.D19 U1.E2 U1.E16 U1.F10 U1.H1 U1.H5 U1.H16 U1.K13 U1.K19 U1.L2 U1.L8 U1.N5 U1.N16 U1.N20 U1.R11 U1.T5 U1.T19 U1.U2 U1.U8 U1.U14 U1.W5 U1.W11 U1.W17 U1.Y8 X1.4 | length 27.8
  Component Side w0.4: P1-1.99@-22.75,-14.7 v1(-21.423,-14.7) v1@-21.323,-14.7 ; v1(-10,3) U1.H1@-9.5,2.5 ; v1(-9,-7) U1.U2@-8.5,-6.5 ; v1(-9,-1) U1.L2@-8.5,-0.5 ; v1(-9,6) U1.E2@-8.5,5.5 ; v1(-7,9) U1.B4@-6.5,8.5 ; v1(-6,-9) U1.W5@-5.5,-8.5 ; v1(-6,-6) U1.T5@-5.5,-5.5 ; v1(-6,-3) U1.N5@-5.5,-2.5 ; v1(-6,3) U1.H5@-5.5,2.5 ; v1(-4,7) U1.D7@-3.5,6.5 ; v1(-3,-9) U1.Y8@-2.5,-9.5 ; v1(-3,-7) U1.U8@-2.5,-6.5 ; v1(-3,-1) U1.L8@-2.5,-0.5 ; v1(-1,5) U1.F10@-0.5,4.5 ; v1(-1,9) U1.B10@-0.5,8.5 ; U1.W11@0.5,-8.5 v1(1,-9) ; U1.R11@0.5,-4.5 v1(1,-5) ; U1.K13@2.5,0.5 v1(3,1) ; U1.D13@2.5,6.5 v1(3,7) ; U1.A13@2.5,9.5 v1(3,10) ; U1.U14@3.5,-6.5 v1(4,-7) ; U1.N16@5.5,-2.5 v1(6,-3) ; U1.H16@5.5,2.5 v1(6,3) ; U1.E16@5.5,5.5 v1(6,6) ; U1.B16@5.5,8.5 v1(6,9) ; U1.W17@6.5,-8.5 v1(7,-9) ; U1.T19@8.5,-5.5 v1(9,-6) ; U1.K19@8.5,0.5 v1(9,1) ; U1.D19@8.5,6.5 v1(9,7) ; U1.N20@9.5,-2.5 v1(10,-3) ; v1(21.423,-14.7) P2-1.100@22.75,-14.7
  Solder Side w0.127: P1-2.99@-22.8,-14.7 P1-2.99@-22.75,-14.7 ; P2-2.100@22.75,-14.7 P2-2.100@22.8,-14.7
  Solder Side w0.4: P1-2.99@-22.75,-14.7 v1(-21.423,-14.7) v1@-21.323,-14.7 ; v1(3,1) P2.1@3.7,0.3 ; v1(21.423,-14.7) P2-2.100@22.75,-14.7
  other v1: -17.4,-19.85 -15.8,-19.85 -14.2,-19.85 20.6,-19.85 22.2,-19.85 23.8,-19.85 -9,12.3 -0.9,15 -23.8,21.35 -22.2,21.35 -20.6,21.35 -2.6,21.35 -1,21.35 0.6,21.35 17.4,21.35 19,21.35
  other v3: 2.8,-17 0,-16.8